# EAGLE board Battery Charger (EAGLE 7.5.0)

Size 100 x 80 mm. Coordinates in mm from the lower left corner, seen from the top.
Outline: 0,0 100,0 100,80 0,80 0,0
Copper layers (1*16): Top 0.035mm / dielectric 1.5mm / Bottom 0.035mm
Design rules "default": minimum track width 10mil, minimum drill 24mil, track to track 8mil, track to pad 8mil, pad to pad 8mil, via to via 8mil, smd to smd 8mil, copper to edge 40mil, drill to drill 8mil, minimum pad ring 10mil, minimum via ring 8mil, stop-mask expansion 4mil, vias tented up to drill 0mil, thermal gap 10mil

## Footprints (pad centres in the part's own frame; a part is rotated, then mirrored left to right if it is on the bottom)
C0805 = smd 1.3 x 1.5: 1 -0.95,0; 2 0.95,0
DIODE-SOT23 = smd 0.6 x 0.65: 1 0.95,0.975; 2 -0.95,0.975; 3 0,-0.975
LED3MM = drill 0.813 octagon: A -1.27,0; K 1.27,0
SMD-2 = smd 2.15 x 5: 1 -4.175,0; 2 4.175,0
PQFN2X2 = smd 0.35 x 0.3: 1 -0.65,-0.88; 2 0,-0.88; 3 0.65,-0.88; 4 0.65,0.87; 5 0,0.87; 6 -0.65,0.87 | smd 0.01 x 0.01: 7 -0.3,0.35 | smd 0.28 x 0.83: 8 0.85,0
R2512 = smd 1.8 x 3.2: 1 -2.8,0; 2 2.8,0
R0805 = smd 1.3 x 1.5: 1 -0.95,0; 2 0.95,0
QFN16-4MM = smd 0.825 x 0.35: 1 -1.988,0.975; 2 -1.988,0.325; 3 -1.988,-0.325; 4 -1.988,-0.975; 9 1.988,-0.975; 10 1.988,-0.325; 11 1.988,0.325; 12 1.988,0.975 | smd 0.35 x 0.825: 5 -0.975,-1.988; 6 -0.325,-1.988; 7 0.325,-1.988; 8 0.975,-1.988; 13 0.975,1.988; 14 0.325,1.988; 15 -0.325,1.988; 16 -0.975,1.988
SOT23 = smd 0.6 x 0.65: 1 0.95,0.975; 2 -0.95,0.975; 3 0,-0.975
SOT323 = smd 0.7 x 0.9: 1 -0.65,-0.95; 2 0.65,-0.95; 3 0,1

## Placement (x,y rotation side)
C1  47n  [C0805]  11.43,57.15 0 top
C4  1u  [C0805]  29.21,52.07 180 top
C5  47n  [C0805]  6.35,66.04 0 top
C6  47n  [C0805]  20.32,64.77 180 top
C8  10u  [C0805]  24.13,69.85 180 top
D1  DIODE-PMEG2010  [DIODE-SOT23]  5.08,-22.86 0 top  (outside the outline)
D2  Red  [LED3MM]  67.31,74.93 0 top
D3  Green  [LED3MM]  60.96,74.93 0 top
D4  DIODE-PMEG2010  [DIODE-SOT23]  5.08,-13.97 0 top  (outside the outline)
D5  DIODE-PMEG2010  [DIODE-SOT23]  5.08,-5.08 0 top  (outside the outline)
L1  [SMD-2]  -19.05,-30.48 0 top  (outside the outline)
L2  [SMD-2]  -30.48,-30.48 0 top  (outside the outline)
Q1  [PQFN2X2]  -11.43,-31.75 0 top  (outside the outline)
R1  0.33  [R2512]  66.04,60.96 0 top
R2  620  [R0805]  67.31,69.85 180 top
R3  10k  [R0805]  60.96,69.85 180 top
U$1  IC-MP26123  [QFN16-4MM]  35.56,67.31 0 top
U$2  IC-XC61C  [SOT23]  -5.08,-22.86 0 top  (outside the outline)
U$3  DIODE-BAV99W  [SOT323]  -3.81,-31.75 0 top  (outside the outline)

## Library data of the parts
C1 C4-C6 C8 R1-R3 = resistor
D1 D4 D5 L1 L2 Q1 U$1-U$3 = Raj
D2 D3 = led

## Nets
1: Q1.1
2: Q1.2
4: Q1.4
5: Q1.5
6: Q1.6
7: Q1.7
8: Q1.8
GND: C1.2 C4.2 C5.2 C6.2 C8.2 D4.1 D5.1 U$1.6 U$1.7 U$1.12
N$1: R2.2 U$1.4
N$2: R3.2 U$1.3
N$3: C4.1 D2.A D3.A U$1.5
N$4: C6.1 C8.1 U$1.1 U$1.16
N$5: C5.1 D5.3
N$6: D2.K R2.1
N$7: D3.K R3.1
N$8: C1.1 U$1.2
N$9: D4.3 U$1.15
N$10: D1.3 R1.1

## Tracks (layer width: path | path; a pad name or v marks a point on that pad's centre or on a via)
GND  (9 unrouted)
N$1  (1 unrouted)
N$2  (1 unrouted)
N$3  (3 unrouted)
N$4  (3 unrouted)
N$5  (1 unrouted)
N$6  (1 unrouted)
N$7  (1 unrouted)
N$8  (1 unrouted)
N$9  (1 unrouted)
N$10  (1 unrouted)